# Altium PCB DriverBoard.PcbDoc
Units mil, origin at the board's own origin, x right, y up, seen from the top; angles counter-clockwise.
Board outline 3959.27 x 1236.07 mil, 2 copper layers (Top Layer, Bottom Layer); 30 components, 24 nets, 135 pads, 70 vias.
Unrouted connection lines stored in the file: 41.
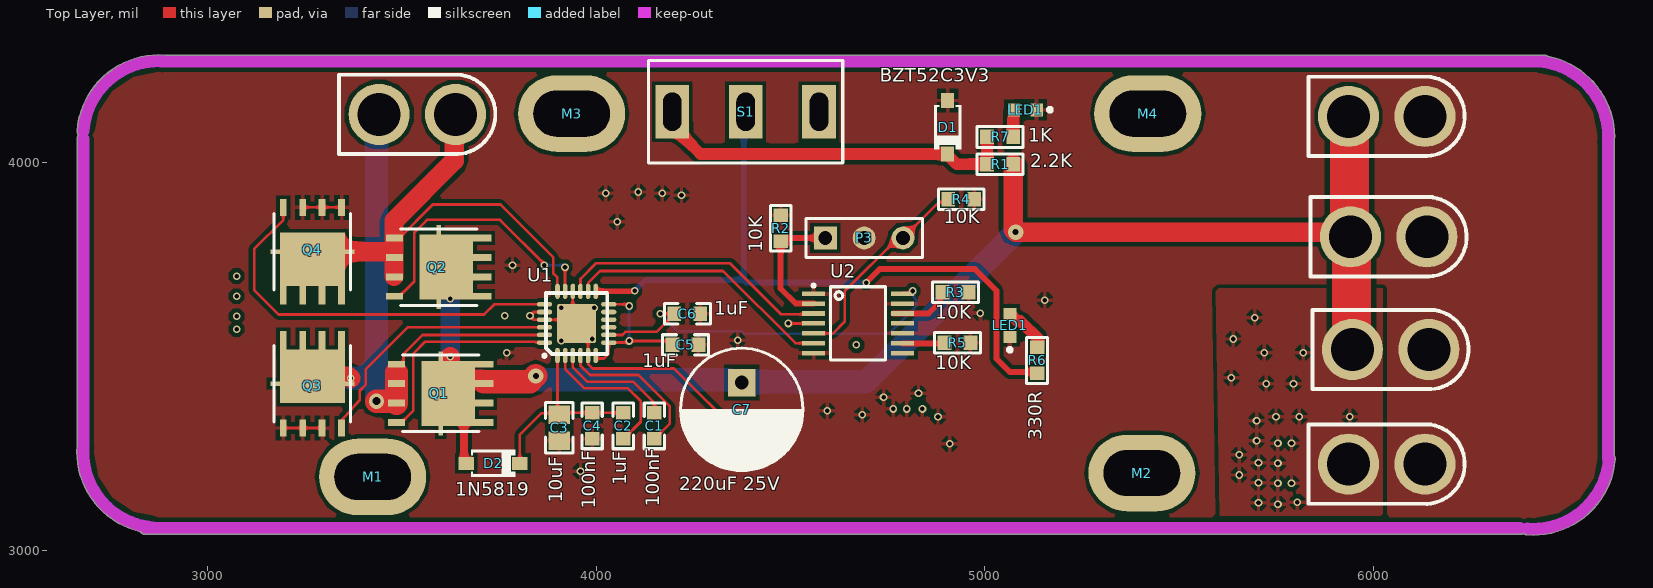
[diagram p0: Top Layer view]
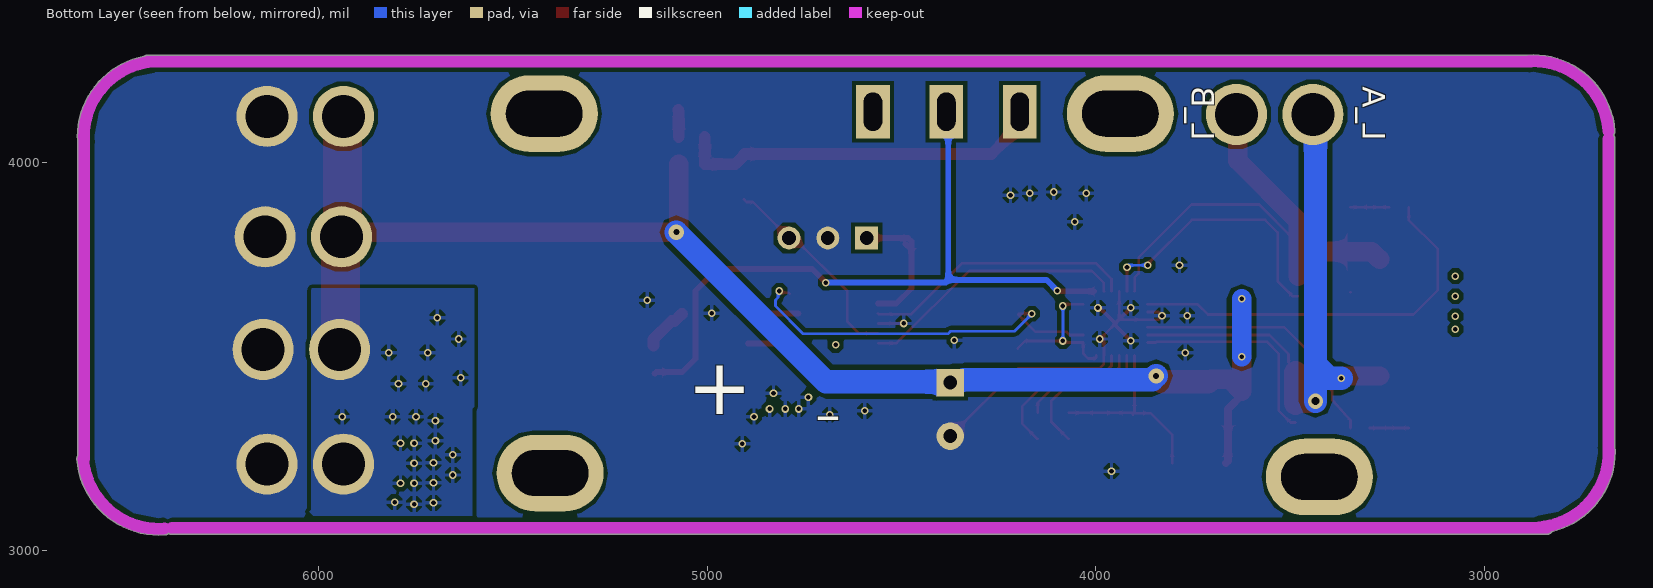
[diagram p1: Bottom Layer view, seen from below]
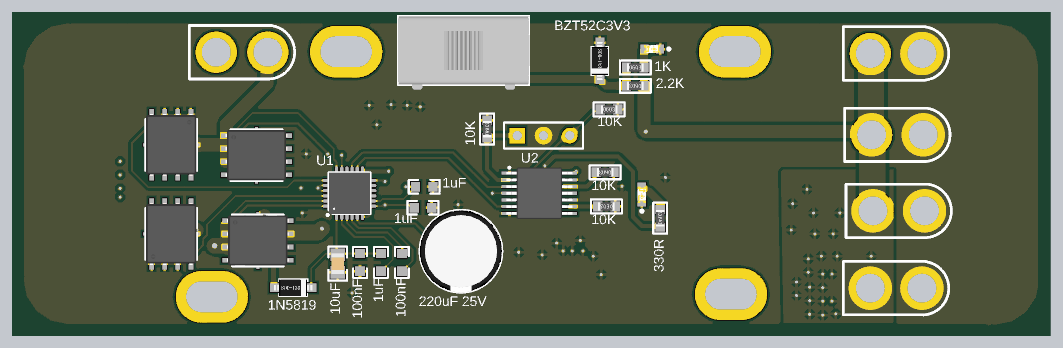
[diagram p2: 3D render of the assembled board from above, using the file's embedded part models]

## Layer stack, top to bottom
Top Solder: solder mask 0.4, Solder Resist, Dk 3.5
Top Layer: signal copper 1.4
Dielectric 1: dielectric 12.6, FR-4, Dk 4.8
Bottom Layer: signal copper 1.4
Bottom Solder: solder mask 0.4, Solder Resist, Dk 3.5

## Board outline
2826.74,3049.25 cw(c2875,3255) 2664.24,3270.59 2664.24,4060 cw(c2680,4060) 2667.82,4070 cw(c2680,4080) 2664.28,4081.21 cw(c2875,4065) 2890.59,4275.76 6440,4275.76 cw(c6440,4260) 6449.44,4272.63 cw(c6410,4065) 6621.34,4065 cw(c6410,4065) 6620.76,4049.41 6620.76,3244.59 cw(c6607.17,3236.61) 6622.93,3236.61 cw(c6607.17,3236.61) 6622.89,3235.4 cw(c6412.17,3251.61) 6395.96,3040.89 cw(c6397.17,3056.61) 6386.73,3044.8 cw(c6377.77,3057.77) 6377.77,3042 2840,3042 cw(c2840,3057.77)

## Design rules (kind name [scope] priority, off if disabled: settings)
Clearance [All] p1: gap=10 ignorepadtopadclearanceinfootprint=TRUE except(0: Arc-Hole Track-Hole SMDPad-Hole THPad-Hole Via-Hole Fill-Hole Poly-Hole Region-Hole Text-Hole)
MinimumSolderMaskSliver [All] p1: minsoldermaskwidth=0
PolygonConnect [All] p1: thpad.connectstyle=Direct thpad.reliefconductorwidth=10 thpad.reliefentries=4 thpad.polygonreliefangle="90 Angle" thpad.airgapwidth=10 smdpad.connectstyle=Relief smdpad.reliefconductorwidth=10 smdpad.reliefentries=4 smdpad.polygonreliefangle="90 Angle" smdpad.airgapwidth=10 via.connectstyle=Relief via.reliefconductorwidth=10 via.reliefentries=4 via.polygonreliefangle="90 Angle" via.airgapwidth=10
RoutingVias [All] p1: holewidth=28 width=50 viastyle="Through Hole" minholewidth=28 minwidth=50 maxholewidth=28 maxwidth=50
SolderMaskExpansion [All] p1: expansion=4 istentingtop=FALSE
Width [All] p1: maxlimit=500 minlimit=7 preferedwidth=10
29 further rules are at their usual default settings.

## Components (designator, comment, footprint, x,y, rotation, side; value= is the part's Value field where it differs from the comment)
C1 "100nF" CAPC1608[0603]S-N 4150,3321.54 r90 top
C2 "1uF" CAPC1608[0603]S-N 4070,3321.54 r90 top
C3 "10uF" CAPC2012[0805]S-N 3905,3316.54 r270 top
C4 "100nF" CAPC1608[0603]S-N 3990,3321.54 r270 top
C5 "1uF" CAPC1608[0603]S-N 4230,3530 r180 top
C6 "1uF" CAPC1608[0603]S-N 4235,3610 r180 top
C7 "220uF 25V" CAPPR3.5-8X11.5 4375,3363.9 r270 top value=220uF
D1 "BZT52C3V3" SOD-123-L 4905,4090 r270 top
D2 "1N5819" SOD-123-L 3735,3225 r0 top
LED1 "" LEDC1608(0603) 5105,4135 r180 top (schematic designator LED?)
LED1 "Blue" LEDC1608(0603) 5065,3580 r90 top
M1 "MountHole" M3-MountSlot 3407.83,3167.2 r0 top
M2 "MountHole" M3-MountSlot 5387.83,3177.2 r0 top
M3 "MountHole" M3-MountSlot 3920,4102.2 r0 top
M4 "MountHole" M3-MountSlot 5402.83,4102.2 r0 top
P3 "Header 3" HDR1X3 4590,3805 r0 top
Q1 "TPH1R403NL" DFN5x6 3600.31,3405 r270 top
Q2 "TPH1R403NL" DFN5x6 3595,3730 r270 top
Q3 "TPH1R403NL" DFN5x6 3270,3430 r0 top
Q4 "TPH1R403NL" DFN5x6 3270,3769.69 r180 top
R1 "2.2K" RESC1608[0603]S-N 5040,3995 r180 top
R2 "10K" RESC1608[0603]S-N 4475,3830 r90 top
R3 "10K" RESC1608[0603]S-N 4925,3665 r180 top
R4 "10K" RESC1608[0603]S-N 4940,3905 r0 top
R5 "10K" RESC1608[0603]S-N 4930,3535 r180 top
R6 "330R" RESC1608[0603]S-N 5135,3490 r90 top
R7 "1K" RESC1608[0603]S-N 5040,4065 r0 top
S1 "SW-SPDT" SS12D10 4385,4130 r180 top
U1 "DRV8701E" QFN24-4x4 3950,3585 r90 top
U2 "SN74HC125PWR" TSSOP-14 4674.17,3585 r0 top

## Footprints (in the part's own frame and the unit in brackets; to place one, negate y for a bottom-side part, rotate by r counter-clockwise, add the part's x,y. Pads: shape width x height; smd on the part's side, far side on the other; paste and mask are expansions set on the pad)
CAPC1608[0603]S-N [mm]
  rect 0.9x0.95 smd: 1(-0.85,0) 2(0.85,0)
  silkscreen extent -1.5,-0.66 1.5,0.66, body extent -0.8,-0.41 0.8,0.41, height 0.79
CAPC2012[0805]S-N [mm]
  rect 1.2x1.4 smd: 1(-0.85,0) 2(0.85,0)
  silkscreen extent -1.65,-0.9 1.65,0.9, body extent -1,-0.63 1,0.62, height 1.25
CAPPR3.5-8X11.5 [mm]
  rect 1.8x1.8 hole 0.9: 1(-1.75,0)
  round 1.8 hole 0.9: 2(1.75,0)
  silkscreen extent -4,-4.01 4,4, body extent -4,-3.98 4,3.98, height 11.5
DFN5x6 [mm]
  rect 0.45x1.6 smd: 1(-1.905,2.65) 1(-0.635,2.65) 1(0.635,2.65) 1(1.905,2.65)
  rect 5.5x0.3 smd: 1(0,0)
  rect 4.25x3.5 smd: 1(0,0.5)
  rect 0.45x1.1 smd: 2(1.905,-2.9) 3(-1.905,-2.9) 3(-0.635,-2.9) 3(0.635,-2.9)
  silkscreen extent -2.5,-2.5 2.5,2.5, body extent -2.45,-3 2.45,3, height 1
HDR1X3 [mm] "Connector; Header; 3 Position"
  rect 1.5x1.5 hole 0.9: 1(0,0)
  round 1.5 hole 0.9: 2(2.54,0) 3(5.08,0)
  silkscreen extent -1.27,-1.27 6.35,1.27
LEDC1608(0603) [mm]
  rect 0.8x0.85 smd: A(0.75,0) C(-0.75,0)
  silkscreen extent -1.73,-0.12 -1.48,0.12, body extent -0.8,-0.4 0.8,0.4, height 0.64
M3-MountSlot [mm]
  oval 7x5 hole 3 slot 5 at 0 deg: 1(0.436,0.579)
QFN24-4x4 [mm]
  rrect10% 2.55x2.55 smd: 0(0,0)
  oval 1x0.3 smd: 1(-2.1,1.25) 2(-2.1,0.75) 3(-2.1,0.25) 4(-2.1,-0.25) 5(-2.1,-0.75) 6(-2.1,-1.25) 13(2.1,-1.25) 14(2.1,-0.75) 15(2.1,-0.25) 16(2.1,0.25) 17(2.1,0.75) 18(2.1,1.25)
  oval 0.3x1 smd: 7(-1.25,-2.1) 8(-0.75,-2.1) 9(-0.25,-2.1) 10(0.25,-2.1) 11(0.75,-2.1) 12(1.25,-2.1) 19(1.25,2.1) 20(0.75,2.1) 21(0.25,2.1) 22(-0.25,2.1) 23(-0.75,2.1) 24(-1.25,2.1)
  silkscreen extent -2.21,-2 2,2.21, body extent -2,-2 2,2, height 0.9
RESC1608[0603]S-N [mm]
  rect 0.9x0.95 smd: 1(-0.85,0) 2(0.85,0)
  silkscreen extent -1.5,-0.67 1.5,0.67, body extent -0.8,-0.4 0.8,0.4, height 0.45
SOD-123-L [mm]
  rect 1x0.85 smd: A(-1.75,0) K(1.75,0)
  silkscreen extent -1.45,-0.9 1.47,0.9, body extent -1.85,-0.8 1.85,0.8, height 1.2
SS12D10 [mm]
  rect 2.2x3.5 hole 1.2 slot 2.5 at 90 deg mask+0.07: 1(-4.8,0) 2(0,0) 3(4.8,0)
  silkscreen extent -6.35,-3.35 6.35,3.35, body extent -6.4,-3.3 6.35,3.8, height 12.5
TSSOP-14 [mm]
  rect 1.5x0.3 smd mask+0.07: 1(-2.9,1.95) 2(-2.9,1.3) 3(-2.9,0.65) 4(-2.9,0) 5(-2.9,-0.65) 6(-2.9,-1.3) 7(-2.9,-1.95) 8(2.9,-1.95) 9(2.9,-1.3) 10(2.9,-0.65) 11(2.9,0) 12(2.9,0.65) 13(2.9,1.3) 14(2.9,1.95)
  silkscreen extent -2.99,-2.4 1.8,2.57, body extent -3.2,-2.5 3.2,2.5, height 1.13

## Part data
C1 C4: library part Cap-Chip_1, "贴片电容", Tolerance=±10%, Voltage=50V, Price(RMB)=0.000, Published=8-Jun-2000, Publisher="Altium Limited", Revision="July-2002: Re-released for DXP Platform."
C2 C5 C6: library part Cap-Chip_2, "贴片电容", Tolerance=±10%, Voltage=25V, Price(RMB)=0.000, Published=8-Jun-2000, Publisher="Altium Limited", Revision="July-2002: Re-released for DXP Platform."
C3: library part Cap-Chip, "贴片电容", Tolerance=±10%, Voltage=25V, Price(RMB)=0.000, Published=8-Jun-2000, Publisher="Altium Limited", Revision="July-2002: Re-released for DXP Platform."
C7: library part Cap-Elect, "Polarized Capacitor (Radial)", Voltage=25V, Price(RMB)=0.000, Published=8-Jun-2000, Publisher="Altium Limited", Revision="July-2002: Re-released for DXP Platform."
D1: library part "Diode Zen", "3.3V稳压二极管 SOD-123", Price(RMB)=0.000, Published=8-Jun-2000, Publisher="Altium Limited", Revision="July-2002: Re-released for DXP Platform."
D2: library part "Diode Schottky", "肖特基二极管 Diode", Imax=500mA, PartNumber=1N5819, Price(RMB)=0.000, Published=8-Jun-2000, Publisher="Altium Limited", Revision="July-2002: Re-released for DXP Platform."
LED1: library part "LED Chip Red", "Typical Chip LED", Price(RMB)=0.00, Published=8-Jun-2000, Publisher="Altium Limited", Revision="July-2002: Re-released for DXP Platform."
LED1: library part "LED Chip Blue", "Typical Chip LED", Color=Blue, Price(RMB)=0.00, Published=8-Jun-2000, Publisher="Altium Limited", Revision="July-2002: Re-released for DXP Platform."
M1 M2 M3 M4: "固定孔"
P3: "Header, 3-Pin", LatestRevisionDate=17-Jul-2002, LatestRevisionNote="Re-released for DXP Platform.", Publisher="Altium Limited"
Q1 Q2 Q3 Q4: "东芝 N沟 MOS"
R1: library part Res-Chip, "贴片电阻", Tolerance=±1%, Price(RMB)=0.000, Published=8-Jun-2000, Publisher="Altium Limited", Revision="July-2002: Re-released for DXP Platform."
R2 R3 R4 R5: library part Res-Chip_1, "贴片电阻", Tolerance=±1%, Price(RMB)=0.000, Published=8-Jun-2000, Publisher="Altium Limited", Revision="July-2002: Re-released for DXP Platform."
R6: library part Res-Chip_3, "贴片电阻", Tolerance=±1%, Price(RMB)=0.000, Published=8-Jun-2000, Publisher="Altium Limited", Revision="July-2002: Re-released for DXP Platform."
R7: library part Res-Chip_2, "贴片电阻", Tolerance=±1%, Price(RMB)=0.000, Published=8-Jun-2000, Publisher="Altium Limited", Revision="July-2002: Re-released for DXP Platform."
S1: "单刀双掷开关 3脚船型、钮子、拨动开关 SPDT Subminiature Toggle Switch", Price(RMB)=0.000, Published=24-Mar-1999, Publisher="Altium Limited"
U1: "DRV8701E Ti全桥驱动芯片"
U2: "三态输出的四路缓冲器 TSSOP-20"

## Free pads (board coordinates)
  round 157.48 hole 110.24: 1(3441.57,4123) 1(5936.57,3223) 1(5936.57,4118) 1(5941.57,3808) 1(5946.57,3518) 2(3638.43,4123) 2(6133.43,3223) 2(6133.43,4118) 2(6138.43,3808) 2(6143.43,3518)

## Via types
v1: diameter 19.68, hole 11.81, Top Layer to Bottom Layer, tented both sides, 67 vias
v2: diameter 39.37, hole 15.75, Top Layer to Bottom Layer, tented both sides, 2 vias
v3: diameter 39.37, hole 20.75, Top Layer to Bottom Layer, tented both sides, 1 vias

## Nets (pads, with @x,y where several pads share a name; then routed paths per layer and width w, separated by ;. In a path a pad name is that pad's centre, name@x,y a point inside that pad or via, vN(x,y) a via of type N, cw(c..) or ccw(c..) an arc to the next point about the centre after c; other vN are vias at no path point)
3V3: D1.K R1.2 R7.1 S1.3 | length 959.3
  Top Layer w30: S1.3 4224.33,4101.69 4224.33,4065.67 4268.89,4021.1 4903.27,4021.1 D1.K 4906.73,4019.37 4906.73,4016.41 4928.15,3995 5003.82,3995 R1.2 R7.1
DVDD: C6.2 U1.8 U2.14 | length 1008.7
  Top Layer w7: U1.8 4067.46,3555.47 4075.33,3563.34 4155.86,3563.34 4196.54,3604.02 4196.54,3605 4200,3608.46 4198.46,3610 v1(4165,3610) ; U2.14 4790.75,3664.18 4810.95,3664.18 4810.95,3664.79 v1(4814.79,3668.63)
  Bottom Layer w7: v1(4165,3610) 4210,3565 4373.91,3565 4380.6,3558.32 4753.31,3558.32 4825,3630 4825,3644.78 4818.04,3651.74 4818.04,3666.2 v1@4815.61,3668.63
GND: C3.2 C4.2 C5.1 C6.1 C7.2 D1.A LED1.C P3.2 pad.2@6133.43,3223 pad.2@6133.43,4118 pad.2@6138.43,3808 pad.2@6143.43,3518 Q3.3 Q4.3 R2.2 R3.1 R4.2 R5.1 U1.0 U1.5 U1.16 U1.20 U1.21 U2.1 U2.4 U2.7 U2.10 U2.13 | length 1276.5
  Top Layer w7: Q3.3@3195,3315.83 3245,3315.83 Q3.3@3295,3315.83 ; Q4.3@3245,3883.86 3295,3883.86 Q4.3@3345,3883.86 ; U1.20 3839.96,3614.53 3834.36,3608.93 3833.93,3608.93 v1(3830,3605) 3830,3604.8 3839.96,3594.84 U1.21 3940.16,3594.84 U1.16 ; U1.0 U1.0@3979.8,3555.2 ; v1(3990,3545) U1.0@3979.8,3555.2 ; C7.2 4200.86,3469.14 3991.17,3469.14 3979.81,3480.51 3979.81,3502.04 U1.5 3979.53,3554.92 U1.0@3979.8,3555.2 ; v1(4495,3585) U2.4
  Top Layer w10: v1(3910,3625) 3940.16,3594.84 U1.0 ; v1(3910.05,3540.13) 3950,3580.08 U1.0 ; v1(3994.87,3624.95) 3989.95,3624.95 U1.0
  other v1: 3960,3205 4910,3275 4880,3345 4685,3350 4595,3360 4765,3365 4800,3365 4840,3365 4740,3395 4830,3405 3770,3510 4364.24,3541.66 3765,3605 4989.24,3611.61 5155,3645 3785,3735 4054.24,3846.61 4220,3915 4025,3920 4170,3920 4108.49,3923.22
L_A: pad.1@3441.57,4123 Q1.3 Q3.1 U1.23 | length 1473.5
  Top Layer w7: Q1.3@3504.29,3485.36 3504.29,3505.97 3553.33,3555 3845.31,3555 3845.51,3555.19 3867.04,3555.19 U1.23
  Top Layer w50: Q3.1@3270,3449.69 3362.33,3449.69 v1(3368.43,3443.59)
  Top Layer w60: v3(3435.15,3384.99) Q1.3@3481.4,3385 ; Q1.3@3486.14,3380 3486.14,3430 3486.14,3458.86
  Bottom Layer w60: v1(3368.43,3443.59) 3399.85,3443.59 3435,3478.73 ; pad.1@3430,4145 3433.59,4141.41 3433.59,4108.48 3435,4107.06 3435,3478.73 ; v3(3435.15,3384.99) 3435,3385.14 3435,3478.73
L_B: pad.2@3638.43,4123 Q2.3 Q4.1 U1.18 | length 1347.1
  Top Layer w7: Q4.1@3345,3665.35 Q4.1@3345.35,3665 ; Q2.3@3480,3705.83 Q2.3@3480.83,3705 ; 3480,3770 3480.83,3770 3480.83,3805 3493.62,3805 3579.62,3891 3754,3891 3890,3755 3890,3713.85 3899.84,3704.01 3899.84,3695.72 3899.87,3668.6 U1.18
  Top Layer w50: Q4.1@3270,3750 3290,3770 3480,3770 ; Q2.3@3480,3705.83 3480,3755 3480,3770 ; pad.2@3635,4140 3635,4003.93 3480,3848.93 3480,3805 3480,3770
L_EN: U1.14 U2.6 | length 692.2
  Top Layer w7: U1.14 3979.81,3667.96 3979.81,3689.49 4010.31,3720 4326.99,3720 4512.81,3534.18 U2.6@4560.46,3534.18
L_EN_IN: P3.3 R4.1 U2.5 | length 534.6
  Top Layer w7: U2.5@4560.83,3559.41 4609.41,3559.41 4640,3590 4640,3668.01 4776.99,3805 P3.3 4882.42,3897.42 4898.95,3897.42 R4.1
L_PH: U1.15 U2.3 | length 705.2
  Top Layer w7: U1.15 3959.84,3699.84 4000,3740 4345,3740 4476.66,3608.34 4558.58,3608.34 U2.3@4560.83,3610.59
L_PH_IN: P3.1 R2.1 U2.2 | length 347.7
  Top Layer w15: R2.1@4485.9,3785 R2.1@4490,3789.1 ; U2.2@4560.83,3636.18 4513.82,3636.18 4475,3675 R2.1 4483.46,3805 P3.1
NetC1_1: C1.1 U1.4 | length 399.8
  Top Layer w7: U1.4 3960.12,3502.04 3960.12,3476.15 3984.13,3452.14 4108.82,3452.14 4190,3370.96 4190,3327.09 4150.98,3288.07 C1.1
NetC1_2: C1.2 U1.3 | length 303.2
  Top Layer w7: U1.3 3940.16,3472.07 3977.09,3435.14 4094.86,3435.14 4150,3380 C1.2
NetC2_1: C2.1 U1.2 | length 379.5
  Top Layer w7: U1.2 3920.47,3467.72 3970.05,3418.14 4081.86,3418.14 4115,3385 4115,3332.09 4070.98,3288.07 C2.1
NetC2_2: C2.2 C3.1 C4.1 D2.K U1.1 | length 512.8
  Top Layer w7: D2.K 3803.9,3298.9 3859.21,3354.21 C3.1@3900.79,3354.21 ; U1.1 C3.1@3900.79,3354.21 ; C3.1 C3.1@3900.79,3354.21 ; C3.1@3905,3355 C4.1 C2.2
NetC5_2: C5.2 U1.6 U1.7 U1.12 | length 395.5
  Top Layer w7: U1.6 3999.21,3497.22 4001.43,3495 4020,3495 4032.68,3507.68 U1.7 4077.35,3535.79 4081.57,3540 4182.32,3540 C5.2@4201.54,3520.78 ; U1.12 4077.35,3634.21 4081.57,3630 v1(4085,3630)
  Bottom Layer w7: v1(4085,3540) v1(4085,3630)
NetLED1_A: LED1.A@5065,3609.53 R6.2 | length 123.5
  Top Layer w7: R6.2 R6.2@5138.94,3527.4
  Top Layer w30: LED1.A@5065,3609.53 5065.98,3609.53 5084.29,3591.22 5092.09,3591.22 5138.94,3544.37 R6.2@5138.94,3527.4
NetLED?_A: LED1.A@5075.47,4135 R7.2 | length 70.8
  Top Layer w30: R7.2 5073.46,4132.01 5075.47,4134.02 LED1.A@5075.47,4135
NetQ1_2: Q1.2 U1.24 | length 554.1
  Top Layer w7: Q1.2 3498.94,3330 3529.64,3360.7 3529.64,3507.27 3560.37,3538 3843.57,3538 3845.51,3536.07 3867.04,3536.07 U1.24
NetQ2_2: Q2.2 U1.17 | length 709.2
  Top Layer w7: Q2.2 3493.62,3655 3532.29,3693.67 3532.29,3703.67 3532.29,3819.25 3564.8,3851.77 3753.23,3851.77 3866.66,3738.34 v1(3866.66,3735) ; v1(3920,3730) 3920.24,3729.76 3920.24,3667.91 U1.17
  Bottom Layer w7: v1(3866.66,3735) 3911.57,3735 3916.57,3730 v1(3920,3730)
NetQ3_2: Q3.2 U1.22 | length 680.4
  Top Layer w7: Q3.2 3345,3335.66 3348.86,3339.99 3353.5,3345.21 3391.65,3388.09 3391.65,3403.02 3391.77,3403.14 3391.77,3411.77 3406.93,3426.93 3406.93,3466.93 3515.05,3575.05 3867.22,3575.05 U1.22
NetQ4_2: Q4.2 U1.19 | length 1028.1
  Top Layer w7: Q4.2 3195,3851.71 3120,3776.71 3120,3670.8 3182.57,3608.23 3712.01,3608.23 3737.99,3634.21 U1.19
NetR3_2: R3.2 U2.12 | length 160.8
  Top Layer w15: U2.12@4765.32,3610.59 U2.12 ; U2.12@4789.17,3610.59 4855.59,3610.59 4885,3640 4885,3653.46 R3.2@4896.54,3665
NetR5_2: R5.2 U2.9 | length 109.5
  Top Layer w7: U2.9@4787.17,3535 U2.9 ; R5.2@4895.35,3533.82 R5.2
  Top Layer w15: U2.9@4789.17,3533.82 R5.2@4895.35,3533.82
nSLEEP: R6.1 S1.2 U1.13 | length 1811
  Top Layer w7: v1@4097.32,3667.68 v1@4100,3665
  Top Layer w15: U1.13@4004.61,3667.68 v1@4097.32,3667.68 ; v1(4695,3690) 4730,3725 4975,3725 5030.77,3669.23 5030.77,3494.23 5065,3460 5131.54,3460 R6.1 R6.1@5135.98,3456.54
  Bottom Layer w15: v1(4099.28,3668.96) 4127.52,3697.2 4380,3697.2 ; S1.2 4380,4125 4380,3697.2 ; v1(4695,3690) 4694.33,3690.67 4386.53,3690.67 4380,3697.2
VM: C7.1 D2.A pad.1@5936.57,3223 pad.1@5936.57,4118 pad.1@5941.57,3808 pad.1@5946.57,3518 Q1.1 Q2.1 R1.1 | length 3795.9
  Top Layer w20: Q1.1@3625,3410 3620,3405 3660,3365 3660,3231.1 D2.A
  Top Layer w50: v1(3625,3499.5) 3625,3410 3656.66,3441.66 3704.65,3441.66 Q1.1@3711.14,3435.16 ; R1.1 5073.46,3826.54 v2(5080,3820) 5929.57,3820 5939.07,3810.5 pad.1@5941.57,3808 ; pad.1@5918,4118 pad.1@5936.57,4118
  Top Layer w60: Q1.1@3711.14,3435.16 3830.16,3435.16 v2(3845,3450)
  Top Layer w100: pad.1@5936.57,3223 pad.1@5941.57,3228 ; pad.1@5936.57,4118 5939.07,4115.5 pad.1@5939.07,3810.5 ; pad.1@5941.57,3513 5946.57,3518 5944.07,3520.5 5944.07,3805.5 pad.1@5941.57,3808
  Bottom Layer w50: v1(3625,3499.5) v1(3625,3648.5)
  Bottom Layer w60: v2(3845,3450) 3855,3440 4339.36,3440 4341.13,3438.23 4369.57,3438.23 C7.1 4377.2,3435 4695,3435 v2(5080,3820)
  Bottom Layer w100: pad.1@5935,3814.57 pad.1@5941.57,3808 ; pad.1@5935,4116.43 pad.1@5936.57,4118 ; pad.1@5936.57,3223 pad.1@5941.57,3228 ; pad.1@5941.57,3513 5946.57,3518 pad.1@5944.07,3520.5
  other v1: 5755,3120 5705,3123.33 5805,3125 5755,3173.33 5790,3173.33 5705,3175 5655,3195 5755,3225 5705,3226.67 5655,3246.67 5755,3276.67 5790,3276.67 5700,3283.33 5700,3335 5750,3345 5810,3345 5940,3345 5725,3430 5795,3430 5635,3445 5720,3510 5820,3510 5640,3545 5695,3600
pads on no net: M1.1 M2.1 M3.1 M4.1 S1.1 U1.9 U1.10 U1.11 U2.8 U2.11
copper on no net:
  other v1: 4670,3530 3075,3570 3075,3603.33 3075,3655 3075,3706.67

## Polygon pours and split planes (outlines as drawn)
GND on Top Layer "NONET_L-01_P-001" (solid, remove dead copper, pour order 4): 2105.71,4272.63 7440,4272.63 7440,3035 6990,2585 6780,2795 2380,2795
VM on Top Layer "NONET_L-01_P-001" (solid, pour order 2): 5595,3675 6025,3675 6025,3095 6020,3090 5605,3090
VM on Top Layer "NONET_L-01_P-001" (solid, pour order 0): 5710,3385 5715,3380 6025,3380 6025,3095 6020,3090 5605,3090 5605,3385
GND on Bottom Layer "NONET_L-01_P-001" (solid, remove dead copper, pour order 5): 2625,4265 6575,4265 6605,4235 6600,4230 6600,3085 6555,3040 6550,3045 2645,3045 2645,4150 2670,4175
VM on Bottom Layer "NONET_L-01_P-001" (solid, pour order 3): 5600,3675 6025,3675 6020,3670 6020,3350 5620,3350 5600,3370
VM on Bottom Layer "NONET_L-01_P-001" (solid, pour order 1): 5605,3385 6020,3385 6020,3105 6025,3100 6015,3090 5605,3090

## Keep-outs
Keep-Out Layer:
  lines w31.5: 2680,3240 2680,4060 ; 2680,3270 ccw(c2875,3255) 2860,3060 ; 2680,4080 cw(c2875,4065) 2890,4260 ; 2840,3057.77 6377.77,3057.77 ; 2880,4260 6440,4260 ; 6397.17,3056.61 ccw(c6412.17,3251.61) 6607.17,3236.61 ; 6425,4260 cw(c6410,4065) 6605,4050 ; 6605,3236.61 6605,4075

## Silkscreen, mask and mechanical layers (free items; w line width, h text height)
Top Overlay:
  lines w10: 3643.78,4020.78 ccw(c3638.43,4123) 3653.57,4224.24 ; 3643.78,4021.03 3338.82,4021.03 3338.82,4224.97 3653.57,4224.97 ; 6138.78,3120.78 ccw(c6133.43,3223) 6148.57,3324.24 ; 6138.78,3121.03 5833.82,3121.03 5833.82,3324.97 6148.57,3324.97 ; 6138.78,4015.78 ccw(c6133.43,4118) 6148.57,4219.24 ; 6138.78,4016.03 5833.82,4016.03 5833.82,4219.97 6148.57,4219.97 ; 6143.78,3705.78 ccw(c6138.43,3808) 6153.57,3909.24 ; 6143.78,3706.03 5838.82,3706.03 5838.82,3909.97 6153.57,3909.97 ; 6148.78,3415.78 ccw(c6143.43,3518) 6158.57,3619.24 ; 6148.78,3416.03 5843.82,3416.03 5843.82,3619.97 6158.57,3619.97
Bottom Overlay:
  text "L_A" at 3332.24,4055 h100 r90
  text "L_B" at 3772.24,4055 h100 r90
  text "-" at 4725,3438.13 h250 r180
  text "+" at 4885,3304.08 h250